# Altium PCB CAN Logger 3b HP3561 PCB - autoroute2.PcbDoc (part 2 of 3)
Units mil, origin at the board's own origin, x right, y up, seen from the top; angles counter-clockwise.
Board outline 2229 x 3254 mil, 4 copper layers (Component Side, Signal Layer 2, Signal Layer 1, Solder Side), stack 33.234 mil thick; 116 components, 130 nets, 579 pads, 364 vias.
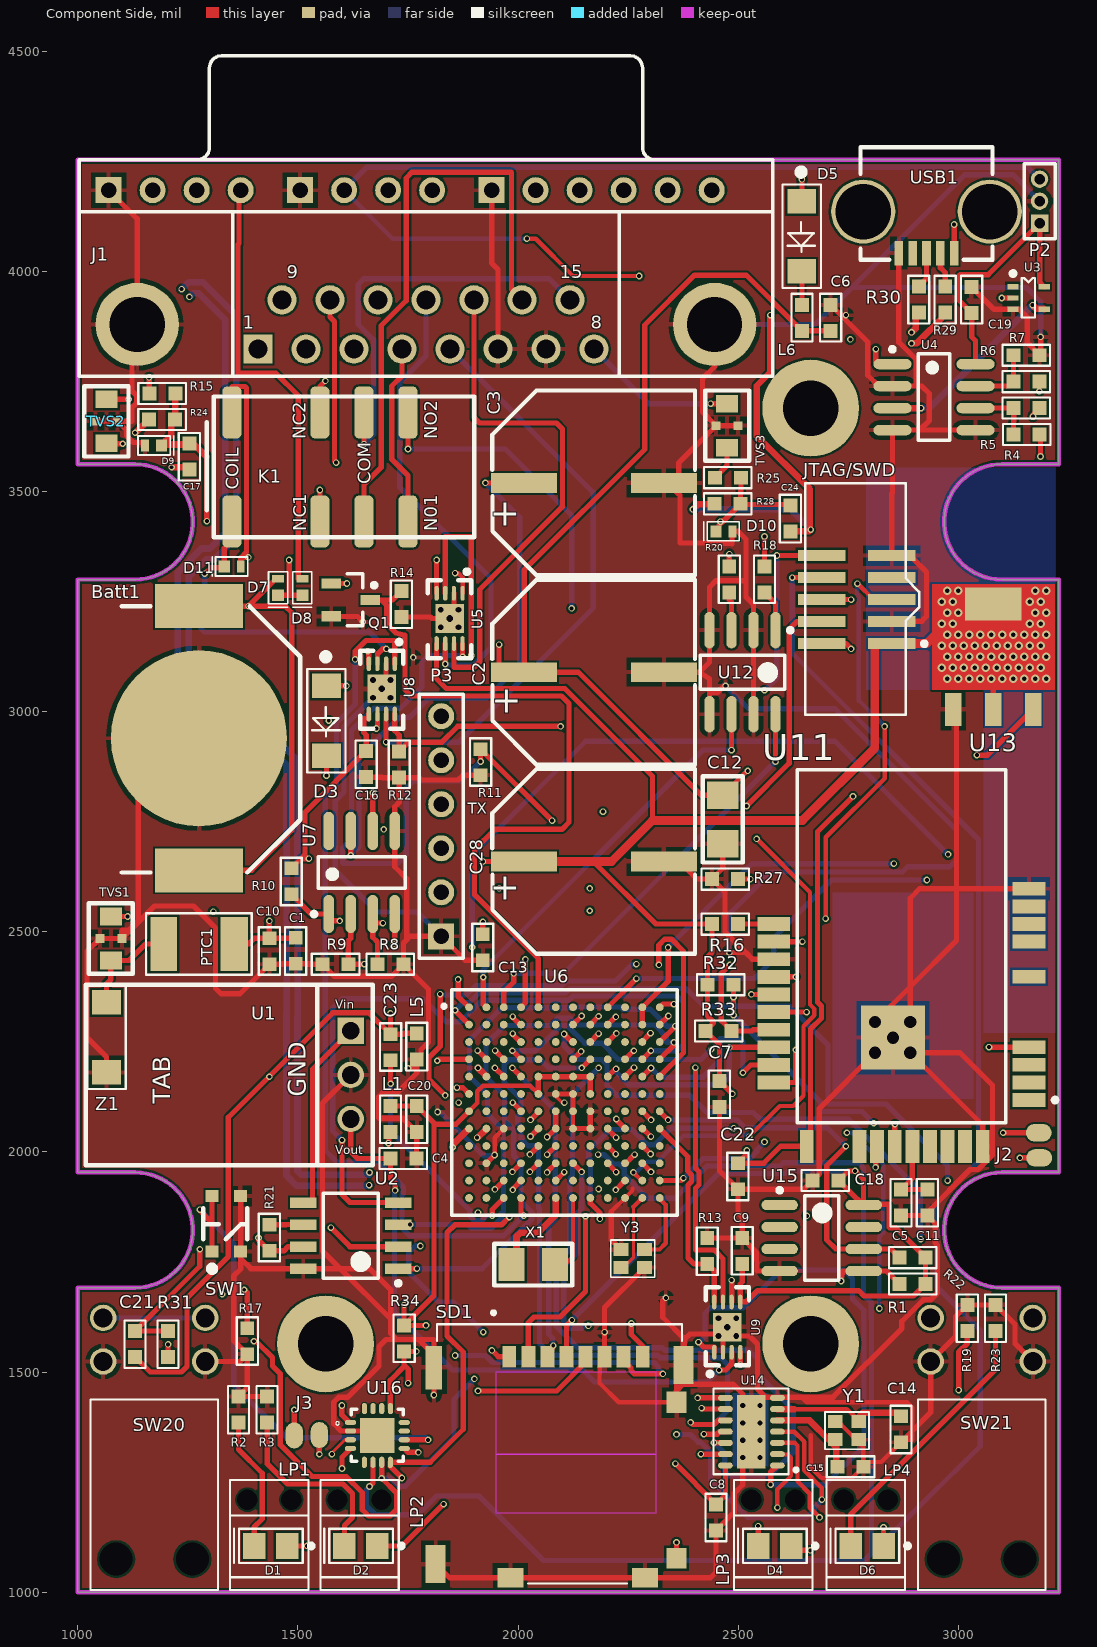
[diagram p0: Component Side view]

## Via types
v1: diameter 15, hole 9, Component Side to Solder Side, 282 vias
v2: diameter 20, hole 10, Component Side to Solder Side, 66 vias
v3: diameter 20, hole 13, Component Side to Solder Side, 12 vias
v4: diameter 50, hole 28, Component Side to Solder Side, 4 vias

## Nets (pads, with @x,y where several pads share a name; then routed paths per layer and width w, separated by ;. In a path a pad name is that pad's centre, name@x,y a point inside that pad or via, vN(x,y) a via of type N, cw(c..) or ccw(c..) an arc to the next point about the centre after c; other vN are vias at no path point) (continued)
D18: (continued)
  Signal Layer 1 w15: I2C.3@1270,4185 1376,4079 1376,3958.5 1472.5,3862 1472.5,3805.14 1629.64,3648 1666.57,3648 1880,3434.57 1880,3392.82 2297,2975.82 2297,2322 2322.13,2296.87 2322.13,2130.15 2361,2091.28 2361,2064.72 2349.28,2053 2322.06,2053 v1@2302.22,2072.83
D19: I2C.2 R22.2 U6.G12 U15.6 | length 3625.7
  Component Side w12: U6.G12@2321.85,2092.48 2341,2073.33 v1(2341,2073) ; v1(2745,2013) 2701.5,1969.5 2701.5,1800 2721.97,1779.53 U15.6@2785.39,1779.53 2846.95,1779.53 R22.2@2866.47,1760
  Signal Layer 1 w15: I2C.2@1170,4185 1337.5,4017.5 1350,3773 1476.35,3773 1621.35,3628 1658.28,3628 1860,3426.28 1860,3384.53 2131.5,3113.03 2131.5,2324.11 2124.69,2317.3 2124.69,2276.32 ; v1(2341,2073) 2260,2154 2153.5,2154 2123.49,2184 2123.49,2236.78 2124.72,2238.01 2124.72,2276.28 ; 2124.69,2276.32 2124.72,2276.28
  Solder Side w12: v1(2341,2073) 2341.5,2072.5 2498,2072.5 2515.5,2055 2703,2055 v1(2745,2013)

## Text inside footprints (layer, text, board x,y; h text height)
C2: Top Overlay "+" at 2009.02,3050 h60 r180
C3: Top Overlay "+" at 2005,3475 h60 r180
C28: Top Overlay "+" at 2005,2625 h60 r180
J1: Top Overlay "1" at 1375,3870 h30; Top Overlay "8" at 2165,3870 h30; Top Overlay "15" at 2095,3985 h30; Top Overlay "9" at 1475,3985 h30
K1: Top Overlay "COIL" at 1365.75,3504.8 h30 r90; Top Overlay "NC1" at 1519.29,3410.32 h30 r90; Top Overlay "N01" at 1816.54,3410.32 h30 r90; Top Overlay "NO2" at 1816.54,3618.98 h30 r90; Top Overlay "NC2" at 1517.32,3618.98 h30 r90; Top Overlay "COM" at 1664.96,3516.61 h30 r90
U1: Top Overlay "GND" at 1518.27,2125 h40 r90; Top Overlay "Vout" at 1585,1995 h20; Top Overlay "TAB" at 1210,2110 h40 r90; Top Overlay "Vin" at 1585,2325 h20